# EAGLE board Yitran_IT900_Hutschiene_1_6 (EAGLE 6.1)
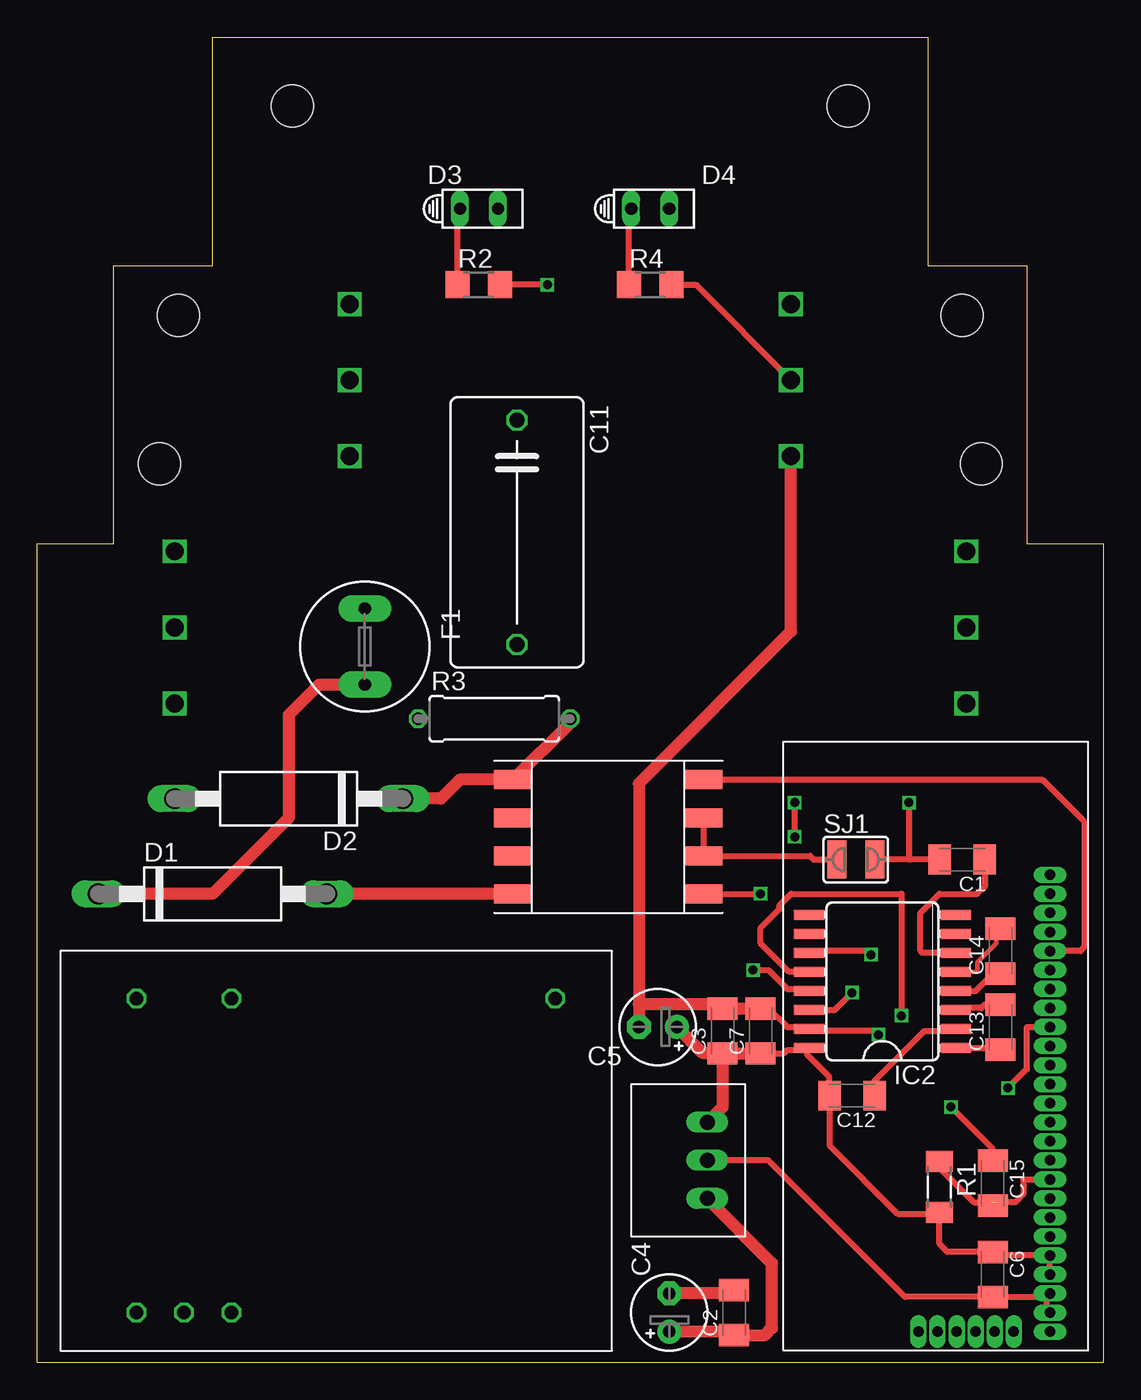
[diagram p0: board, top side]
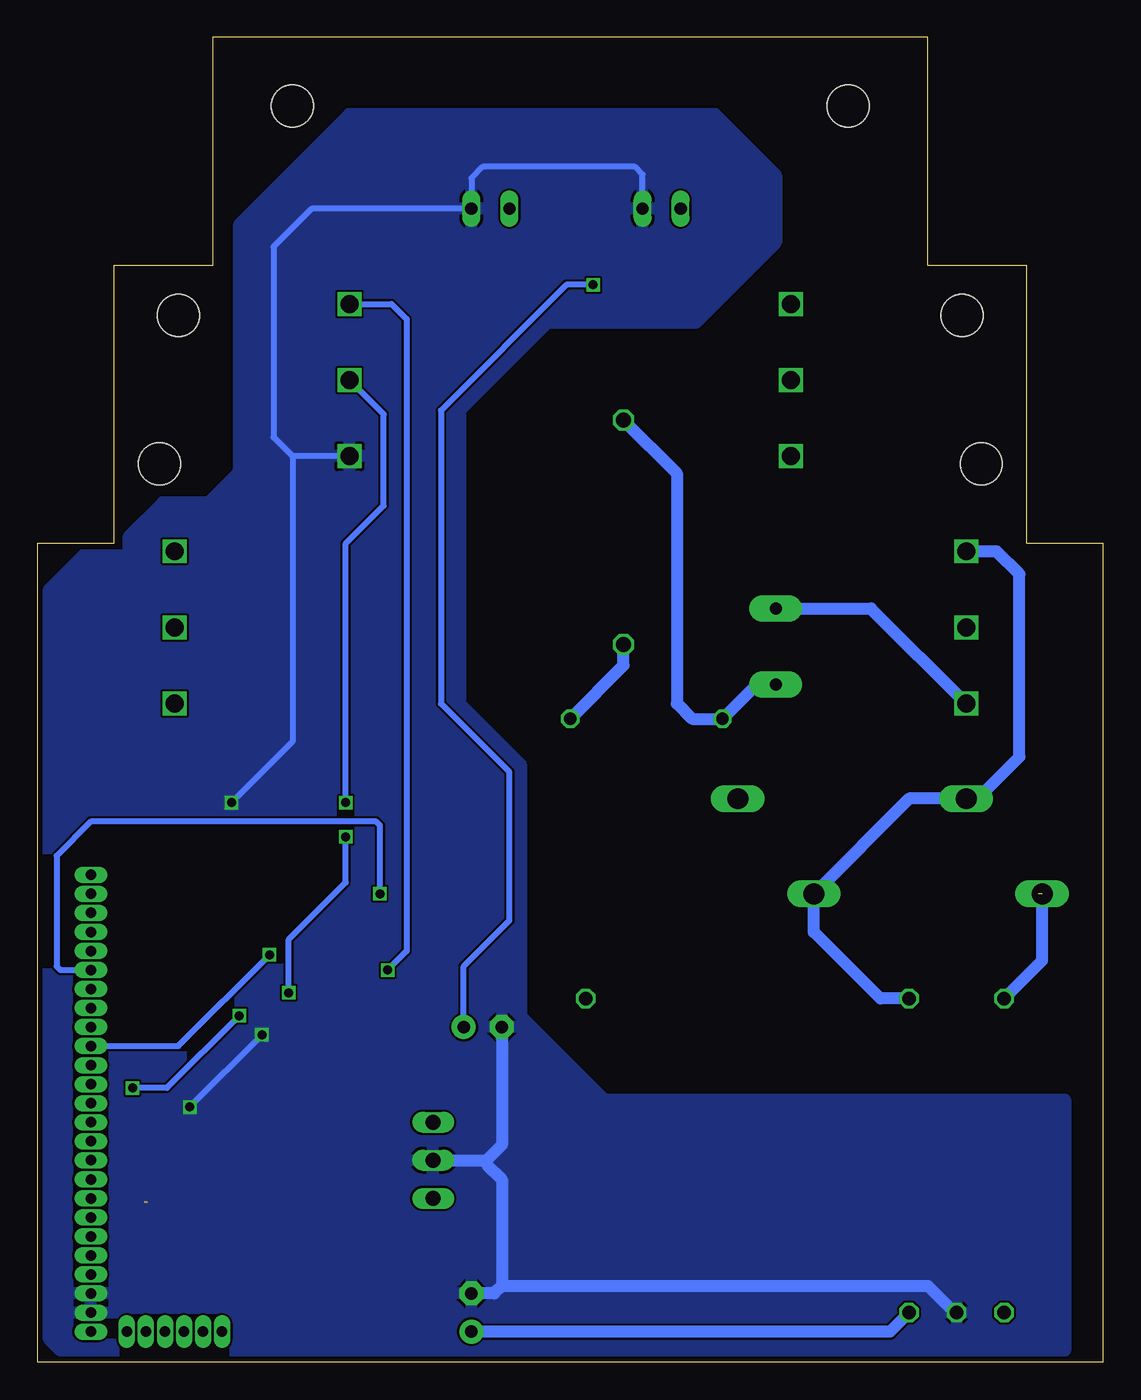
[diagram p1: board, bottom side, seen from below]

Size 71.12 x 88.39 mm. Coordinates in mm from the lower left corner, seen from the top.
Copper layers (1*16): Top 0.035mm / dielectric 1.5mm / Bottom 0.035mm
Design rules: minimum track width 0.15mm, minimum drill 0.3mm, track to track 0.15mm, track to pad 0.15mm, pad to pad 0.15mm, via to via 0.15mm, smd to smd 0.15mm, copper to edge 0.3mm, drill to drill 0.2mm, minimum pad ring 0.2mm, minimum via ring 0.15mm, stop-mask expansion 0.075mm, vias tented up to drill 0mil, thermal gap 0.2mm

## Footprints (pad centres in the part's own frame; a part is rotated, then mirrored left to right if it is on the bottom)
C1206K = smd 1.5 x 2: 1 -1.5,0; 2 1.5,0
E2,5-5 = drill 0.813 pad 1.6: + -1.27,0 | drill 0.813 pad 1.6 octagon: - 1.27,0
C150-091X182 = drill 1.016 octagon: 1 -7.493,0; 2 7.493,0
CB417-15 = drill 1.397 long: A 7.62,0; C -7.62,0
HLMP6 = drill 0.813 long: A -1.27,0; K 1.27,0
TR5 = drill 0.813 pad 1.778 long: 1 -2.54,0; 2 2.54,0
SO16L = smd 0.66 x 2.032: 1 -4.445,-4.902; 2 -3.175,-4.902; 3 -1.905,-4.902; 4 -0.635,-4.902; 5 0.635,-4.902; 6 1.905,-4.902; 7 3.175,-4.902; 8 4.445,-4.902; 9 4.445,4.902; 10 3.175,4.902; 11 1.905,4.902; 12 0.635,4.902; 13 -0.635,4.902; 14 -1.905,4.902; 15 -3.175,4.902; 16 -4.445,4.902
M1406 = smd 1.4 x 1.8: 1 -1.7,0; 2 1.7,0
R1206 = smd 1.6 x 1.803: 1 -1.422,0; 2 1.422,0
0309/10 = drill 0.813 octagon: 1 -5.08,0; 2 5.08,0
SJW = smd 1.27 x 2.54: 1 -1.27,0; 2 1.27,0
RECOM785X = drill 1 long: GND 0,2.54; VIN -2.54,2.54; VOUT 2.54,2.54
LDG-A-12 = drill 1.2 square: P$1 -26.416,-44.45; P$2 -26.416,-39.37; P$3 -26.416,-34.29; P$4 -14.732,-27.94; P$5 -14.732,-22.86; P$6 -14.732,-17.78; P$7 26.416,-44.45; P$8 26.416,-39.37; P$9 26.416,-34.29; P$10 14.732,-27.94; P$11 14.732,-22.86; P$12 14.732,-17.78 | hole 2.8: -18.542,-4.572; 18.542,-4.572; 26.162,-18.542; -26.162,-18.542; -27.432,-28.448; 27.432,-28.448
MODEM_FUSS = drill 0.7 pad 0.813 long: P$1 -20.32,-8.89; P$2 -19.05,-8.89; P$3 -17.78,-8.89; P$4 -16.51,-8.89; P$5 -15.24,-8.89; P$6 -13.97,-8.89; P$7 -12.7,-8.89; P$8 -11.43,-8.89; P$9 -10.16,-8.89; P$10 -8.89,-8.89; P$11 -7.62,-8.89; P$12 -6.35,-8.89; P$13 -5.08,-8.89; P$14 -3.81,-8.89; P$15 -2.54,-8.89; P$16 -1.27,-8.89; P$17 0,-8.89; P$18 1.27,-8.89; P$19 2.54,-8.89; P$20 3.81,-8.89; P$21 5.08,-8.89; P$22 6.35,-8.89; P$23 7.62,-8.89; P$24 8.89,-8.89; P$25 10.16,-8.89; P$29 -20.32,-3.937; P$30 -20.32,-5.207; P$31 -20.32,-6.477 | drill 0.7 pad 0.61 long: P$26 -20.32,-0.127; P$27 -20.32,-1.397; P$28 -20.32,-2.667
RAC04_12SA = drill 0.9 octagon: +VO 25.4,24.13; GND 28.575,24.13; L 31.75,3.175; N 25.4,3.175; NC 3.81,3.175; NC1 31.75,24.13
PLC-UEBERTRAGER_V2 = smd 2.54 x 1.27: 1LINE1 6.35,3.81; 2 6.35,1.27; 3 6.35,-1.27; 4LINE2 6.35,-3.81; 6NC -6.35,1.27; 7NC -6.35,-1.27; 8N -6.35,-3.81; L5 -6.35,3.81

## Placement (x,y rotation side)
C1  100n  [C1206K]  61.72,33.53 180 top
C2  100n  [C1206K]  46.48,3.3 90 top
C3  100n  [C1206K]  45.72,22.1 90 top
C4  4µ7  [E2,5-5]  42.16,3.3 90 top
C5  4µ7  [E2,5-5]  41.4,22.35 180 top
C6  100n  [C1206K]  63.75,5.84 270 top
C7  100n  [C1206K]  48.26,22.1 90 top
C11  470n  [C150-091X182]  32,55.37 270 top
C12  100n  [C1206K]  54.36,17.78 180 top
C13  100n  [C1206K]  64.26,22.35 90 top
C14  100n  [C1206K]  64.26,27.43 90 top
C15  100n  [C1206K]  63.75,11.94 270 top
D1  P6KE418C  [CB417-15]  11.68,31.24 0 top
D2  P6KE6V8C  [CB417-15]  16.76,37.59 180 top
D3  Power_3,3V rot  [HLMP6]  29.46,76.96 0 top
D4  TxD gruen  [HLMP6]  40.89,76.96 0 top
F1  1A  [TR5]  21.84,47.75 270 top
IC2  MAX3232CWE  [SO16L]  56.39,25.4 90 top
R1  100k  [M1406]  60.2,11.68 270 top
R2  330R  [R1206]  29.46,71.88 0 top
R3  470k  [0309/10]  30.48,42.93 0 top
R4  330R  [R1206]  40.89,71.88 0 top
SJ1  [SJW]  54.61,33.53 0 top
U$1  RECOM_783_3  [RECOM785X]  47.24,13.46 90 top
U$2  LDG-A-12  [LDG-A-12]  35.56,88.39 0 top
U$3  MODEMSTECKER  [MODEM_FUSS]  58.67,22.35 90 top
U$9  RECOM_RAC04_12SA  [RAC04_12SA]  38.35,27.43 180 top
U$10  PLC_UEBERTRAGER_V2  [PLC-UEBERTRAGER_V2]  38.1,35.05 0 top

## Library data of the parts
C1-C7 C11-C15 R1-R4 = resistor
D1 D2 = diode
D3 D4 = display-hp; MF: AGILENT TECHNOLOGIES; MPN: HLMP-6500; OC_FARNELL: 1652490; OC_NEWARK: 40K0088
F1 = fuse; OC_FARNELL: unknown; OC_NEWARK: unknown
IC2 = maxim; MF: MAXIM; MPN: MAX3232CWE+; OC_FARNELL: 9725504; OC_NEWARK: 68K4630
SJ1 = jumper
U$1 U$3 U$9 U$10 = ADS
U$2 = Erni_LDG_A_12_Leiterplatte

## Nets
3V3: C3.1 C5.+ C6.1 C7.1 C12.2 IC2.16 R1.2 R2.2 U$1.VOUT U$3.P$4 U$3.P$5
GND: C1.2 C2.2 C3.2 C4.- C5.- C6.2 C7.2 C15.1 D3.K D4.K IC2.15 SJ1.2 U$1.GND U$2.P$10 U$3.P$2 U$3.P$3 U$9.GND
L: C11.1 D1.C F1.2 R3.1 U$9.L
N: D1.A D2.A U$2.P$3 U$9.N U$10.8N
N$1: F1.1 U$2.P$1
N$2: C11.2 D2.C R3.2 U$10.L5
N$3: C2.1 C4.+ U$1.VIN U$9.+VO
N$4: D3.A R2.1
N$5: U$3.P$21 U$10.1LINE1
N$6: U$3.P$20 U$10.4LINE2
N$7: C13.1 IC2.1
N$8: C13.2 IC2.3
N$9: C14.1 IC2.4
N$10: C14.2 IC2.5
N$11: C12.1 IC2.2
N$12: C1.1 IC2.6
N$13: D4.A R4.1
N$14: SJ1.1 U$10.2 U$10.3
N$16: IC2.11 U$3.P$16
N$18: IC2.12 U$3.P$17
N$19: C15.2 R1.1 U$3.P$9
RXD: IC2.13 U$2.P$12
TXD: IC2.14 R4.2 U$2.P$11

## Tracks (layer width: path | path; a pad name or v marks a point on that pad's centre or on a via)
3V3  (via drill 0.6)
  Top 0.406: v34.04,71.88 R2.2 | U$3.P$4 U$3.P$5 63.98,7.11 C6.1 60.73,7.34 60.2,7.87 60.2,9.91 | 60.2,9.91 R1.2 | 60.2,9.91 57.4,9.91 52.86,14.45 C12.2 52.83,17.8 52.83,19.05 51.36,20.52 51.36,20.83 | C7.1 49.81,20.6 50.04,20.83 51.36,20.83 | 51.36,20.83 IC2.16
  Top 0.813: C3.1 45.72,17.02 U$1.VOUT | C3.1 44.43,20.6 C5.+ | C3.1 C7.1
  Bottom 0.406: C5.+ 42.67,26.42 39.62,29.46 39.62,39.37 44.2,43.94 44.2,63.5 35.81,71.88 v34.04,71.88
GND  (via drill 0.6)
  Top 0.406: 67.33,4.34 C6.2 57.89,4.34 48.77,13.46 U$1.GND | 67.33,4.34 U$3.P$3 | 67.33,4.34 67.33,3.53 U$3.P$2 | C7.2 48.79,23.6 50.04,22.35 51.36,22.35 IC2.15 51.61,22.1 55.88,22.1 v56.13,21.84 | C1.2 58.17,33.53 | 58.17,33.53 SJ1.2 | v58.17,37.34 58.17,33.53 | C15.1 63.75,14.22 v60.96,17.02
  Top 0.813: C2.2 46.25,4.57 C4.- | 40.13,23.88 45.72,23.88 C3.2 C7.2 | 40.13,23.88 C5.- | U$2.P$10 50.29,48.77 40.13,38.61 40.13,23.88
  Bottom 0.406: D3.K 30.73,79.25 31.24,79.76 41.4,79.76 42.16,78.99 D4.K 52.83,76.96 55.37,74.42 55.37,61.72 54.1,60.45 | 54.1,60.45 54.1,41.4 v58.17,37.34 | v60.96,17.02 v56.13,21.84 | U$2.P$10 54.1,60.45
  Bottom 0.813: U$1.GND 41.15,13.46 | C5.- 40.13,14.48 41.15,13.46 | 41.15,13.46 41.15,13.21 40.13,12.19 40.13,5.08 | 40.13,5.08 40.64,4.57 C4.- | 40.13,5.08 11.68,5.08 9.91,3.3 U$9.GND
  pour Bottom: 2.54,0.76 69.6,0.76 70.36,1.52 70.36,51.56 68.07,53.85 65.02,53.85 65.02,55.12 62.74,57.4 59.69,57.4 57.66,59.44 57.66,75.95 50.29,83.31 25.91,83.31 21.84,79.25 21.84,74.68 27.18,69.34 37.08,69.34 42.93,63.5 42.93,43.94 38.86,39.88 38.86,23.11 33.27,17.53 2.54,17.53
L  (1 unrouted)
  Top 0.813: F1.2 18.8,45.21 16.76,43.18 16.76,36.32 11.68,31.24 4.32,31.24 4.06,30.99
  Bottom 0.813: U$9.L 4.06,26.8 D1.C | F1.2 23.11,45.21 R3.1 27.43,42.93 28.45,43.94 28.45,59.31 C11.1
N
  Top 0.813: U$10.8N D1.A
  Bottom 0.813: U$9.N 14.86,24.26 19.3,28.7 D1.A 12.95,37.59 D2.A 9.4,37.85 8.13,37.85 5.59,40.39 5.59,52.58 7.11,54.1 U$2.P$3
N$1
  Bottom 0.813: F1.1 15.49,50.29 U$2.P$1
N$2  (via drill 0.6)
  Top 0.813: D2.C 26.92,37.59 28.19,38.86 U$10.L5 35.56,42.67 R3.2
  Bottom 0.813: R3.2 32,46.48 C11.2
  other vias: 35.56,42.93
N$3
  Top 0.813: C4.+ 46.25,2.03 C2.1 48.54,1.8 49.02,2.29 49.02,6.6 U$1.VIN
  Bottom 0.813: U$9.+VO 14.22,2.03 C4.+
N$4
  Top 0.406: R2.1 28.04,76.81 D3.A
N$5
  Top 0.406: U$10.1LINE1 67.06,38.86 69.85,36.07 69.85,27.69 69.6,27.43 U$3.P$21
N$6  (via drill 0.6)
  Top 0.406: U$10.4LINE2 v48.26,31.24
  Bottom 0.406: v48.26,31.24 48.26,35.81 48.51,36.07 67.56,36.07 69.85,33.78 69.85,26.42 69.6,26.16 U$3.P$20
N$7
  Top 0.406: IC2.1 64.16,20.95 C13.1
N$8
  Top 0.406: C13.2 63.22,23.85 62.99,23.62 61.42,23.62 IC2.3
N$9
  Top 0.406: IC2.4 62.61,24.76 63.75,25.91 64.24,25.91 C14.1
N$10
  Top 0.305: IC2.5 62.61,26.03 62.74,26.16 62.74,26.67 64.01,27.94 64.01,28.68
  Top 0.406: 64.01,28.68 C14.2
N$11
  Top 0.406: C12.1 55.86,18.77 59.18,22.1 61.16,22.1 IC2.2
N$12
  Top 0.406: IC2.6 59.06,27.3 58.93,27.43 58.93,29.97 60.2,31.24 62.74,31.24 63.25,31.75 63.25,33.5 C1.1
N$13
  Top 0.406: R4.1 39.47,76.81 D4.A
N$14
  Top 0.406: U$10.2 U$10.3 51.56,33.78 51.82,33.53 SJ1.1
N$16  (via drill 0.6)
  Top 0.406: v55.63,27.18 55.37,27.43 51.61,27.43 IC2.11
  Bottom 0.406: U$3.P$16 61.72,21.08 v55.63,27.18
N$18  (via drill 0.6)
  Top 0.406: IC2.12 50.17,26.03 48.26,27.94 48.26,28.96 49.53,30.23 49.53,30.48 50.29,31.24 57.66,31.24 v57.66,23.11 | v64.77,18.29 66.04,19.56 66.04,22.35 U$3.P$17
  Bottom 0.406: v57.66,23.11 62.48,18.29 v64.77,18.29
N$19  (1 unrouted)
  Top 0.406: U$3.P$9 65.79,12.19 65.79,11.18 65.28,10.67 63.98,10.67 C15.2 | R1.1 60.2,12.95 62.48,10.67 63.75,10.67
RXD  (via drill 0.6)
  Top 0.406: v47.75,26.16 48.77,26.16 50.04,24.89 51.36,24.89 IC2.13
  Bottom 0.406: v47.75,26.16 46.48,27.43 46.48,69.6 47.5,70.61 U$2.P$12
TXD  (via drill 0.6)
  Top 0.406: IC2.14 53.21,23.49 v54.36,24.64 | v50.55,35.05 v50.55,37.34 | R4.2 43.94,71.88 U$2.P$11
  Bottom 0.406: v54.36,24.64 54.36,28.19 50.55,32 v50.55,35.05 | v50.55,37.34 50.55,54.61 48.01,57.15 48.01,63.25 U$2.P$11